# EAGLE board esp_teensy_bridge (EAGLE 9.6.2)
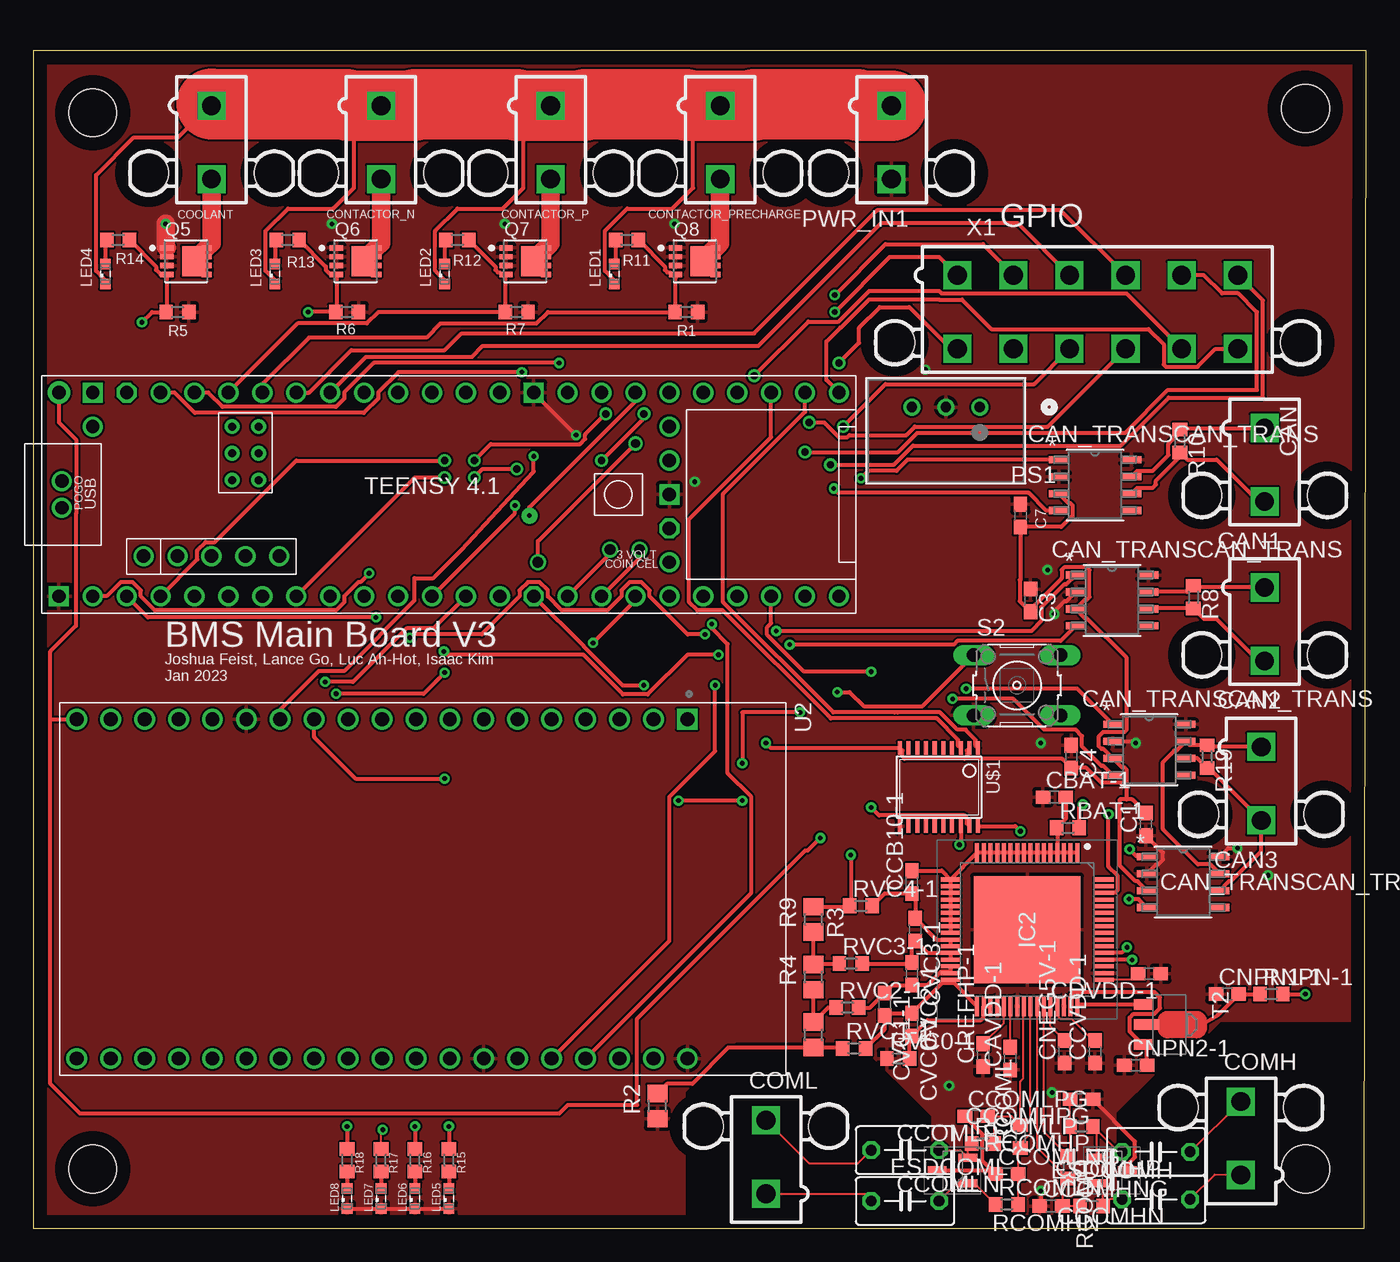
[diagram p0: board, top side]
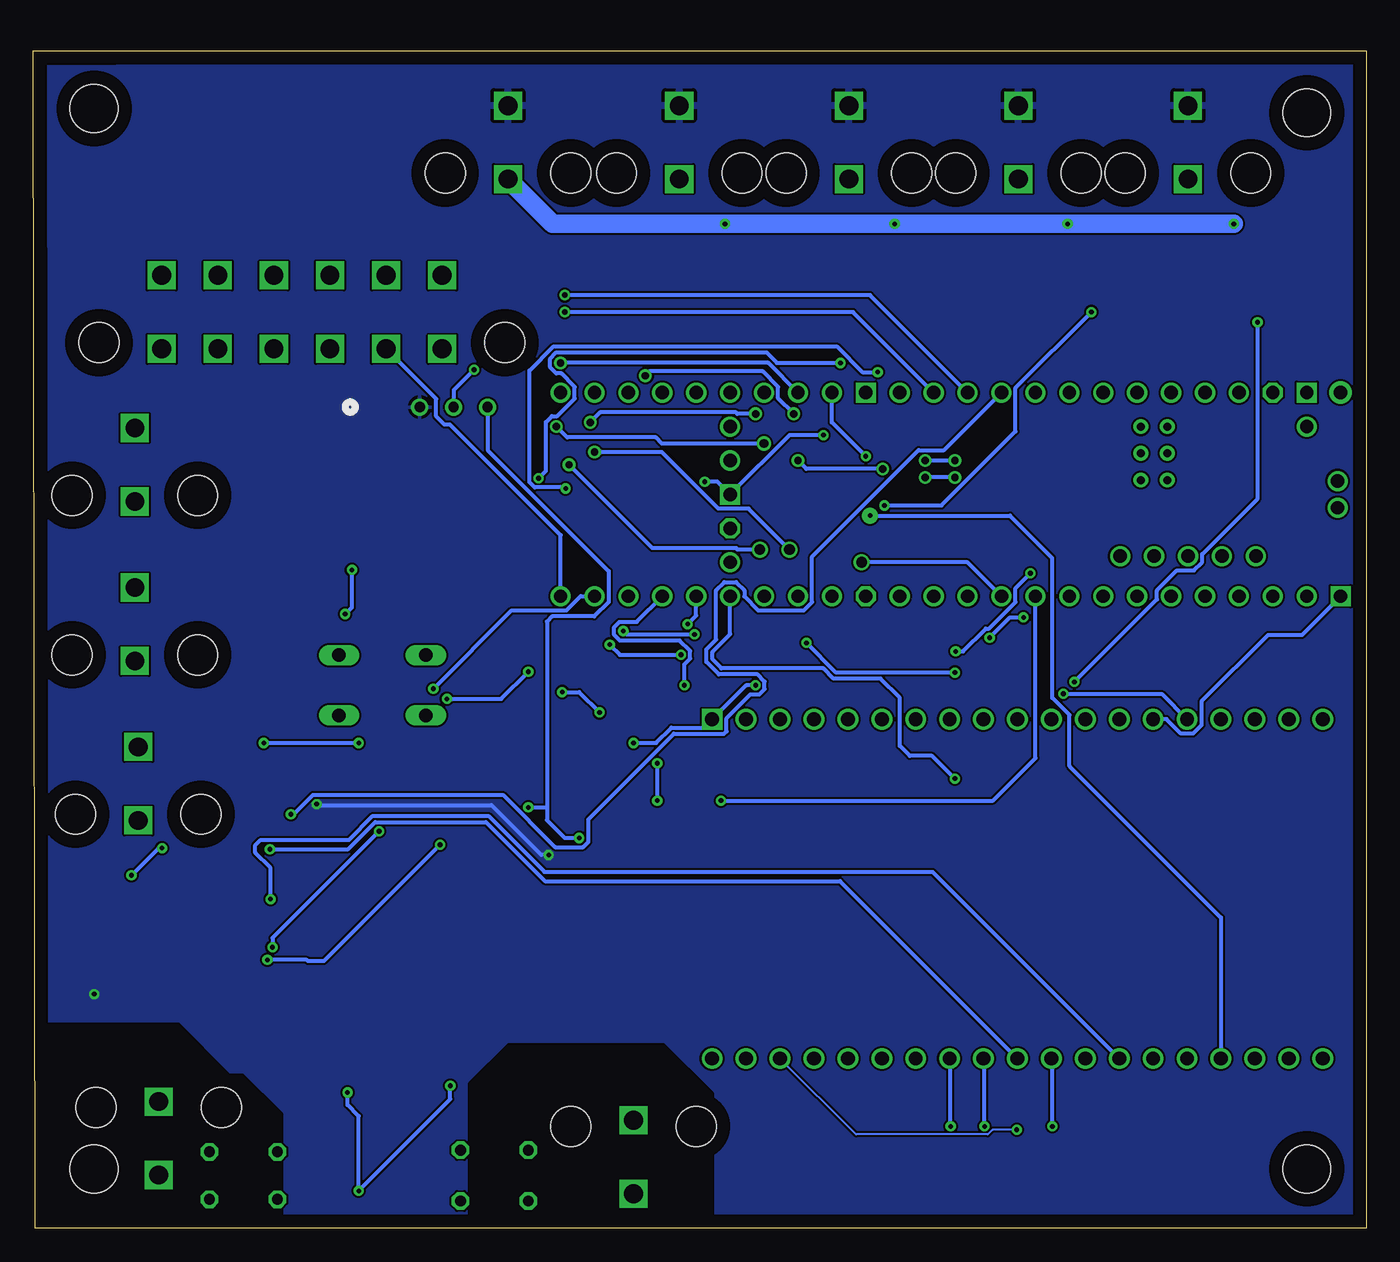
[diagram p1: board, bottom side, seen from below]

Size 99.8 x 88.13 mm. Coordinates in mm from the lower left corner, seen from the top.
Outline: 0,0 99.67,0 99.8,88.13 0,88.13 0,0
Copper layers (1*16): Top 0.035mm / dielectric 1.5mm / Bottom 0.035mm
Design rules "default *": minimum track width 6mil, minimum drill 0.35mm, track to track 6mil, track to pad 6mil, pad to pad 6mil, via to via 6mil, smd to smd 6mil, copper to edge 40mil, drill to drill 6mil, minimum pad ring 10mil, minimum via ring 8mil, stop-mask expansion 4mil, vias tented up to drill 0mil, thermal gap 10mil
Holes 3.6 mm at 4.45,4.45 95.25,4.45 95.25,83.82 4.45,83.5

## Footprints (pad centres in the part's own frame; a part is rotated, then mirrored left to right if it is on the bottom)
C0603 = smd 1.1 x 1: 1 -0.85,0; 2 0.85,0
5566-2 = drill 1.4 square: 1 0,-2.75; 2 0,2.75 | hole 3: 4.7,2.29; -4.7,2.29
C050-035X075 = drill 0.813 octagon: 1 -2.54,0; 2 2.54,0
SOT95P255X150-3N = smd 1.4 x 0.6: 1 -1.15,0.95; 2 -1.15,-0.95; 3 1.15,0
QFP50P1200X1200X120-65N = smd 1.475 x 0.3: 1 -5.738,3.75; 2 -5.738,3.25; 3 -5.738,2.75; 4 -5.738,2.25; 5 -5.738,1.75; 6 -5.738,1.25; 7 -5.738,0.75; 8 -5.738,0.25; 9 -5.738,-0.25; 10 -5.738,-0.75; 11 -5.738,-1.25; 12 -5.738,-1.75; 13 -5.738,-2.25; 14 -5.738,-2.75; 15 -5.738,-3.25; 16 -5.738,-3.75; 33 5.738,-3.75; 34 5.738,-3.25; 35 5.738,-2.75; 36 5.738,-2.25; 37 5.738,-1.75; 38 5.738,-1.25; 39 5.738,-0.75; 40 5.738,-0.25; 41 5.738,0.25; 42 5.738,0.75; 43 5.738,1.25; 44 5.738,1.75; 45 5.738,2.25; 46 5.738,2.75; 47 5.738,3.25; 48 5.738,3.75 | smd 0.3 x 1.475: 17 -3.75,-5.738; 18 -3.25,-5.738; 19 -2.75,-5.738; 20 -2.25,-5.738; 21 -1.75,-5.738; 22 -1.25,-5.738; 23 -0.75,-5.738; 24 -0.25,-5.738; 25 0.25,-5.738; 26 0.75,-5.738; 27 1.25,-5.738; 28 1.75,-5.738; 29 2.25,-5.738; 30 2.75,-5.738; 31 3.25,-5.738; 32 3.75,-5.738; 49 3.75,5.738; 50 3.25,5.738; 51 2.75,5.738; 52 2.25,5.738; 53 1.75,5.738; 54 1.25,5.738; 55 0.75,5.738; 56 0.25,5.738; 57 -0.25,5.738; 58 -0.75,5.738; 59 -1.25,5.738; 60 -1.75,5.738; 61 -2.25,5.738; 62 -2.75,5.738; 63 -3.25,5.738; 64 -3.75,5.738 | smd 8 x 8: 65 0,0
SML0603 = smd 0.8 x 0.8: A 0.75,0; C -0.75,0
TSR1-SINGLE_TRP = drill 0.762 pad 1.27: 1 0,0; 2 2.54,0; 3 5.08,0
VISHAY_SIS862DN-T1-GE3_0 = smd 0.99 x 0.405: 1 -1.435,0.99; 2 -1.435,0.33; 3 -1.435,-0.33; 4 -1.435,-0.99 | smd 0.76 x 0.405: 5,6,7,8 1.55,-0.99; 5,6,7,8-2 1.55,-0.33; 5,6,7,8-3 1.55,0.33; 5,6,7,8-4 1.55,0.99 | smd 1.725 x 2.235: 5,6,7,8-5 0.557,0
R0603 = smd 1 x 1.1: 1 -0.85,0; 2 0.85,0
R0805 = smd 1.3 x 1.5: 1 -0.95,0; 2 0.95,0
B3F-10XX = drill 1.016 long: 1 -3.251,2.261; 2 3.251,2.261; 3 -3.251,-2.261; 4 3.251,-2.261
SOT89-BCE = smd 0.8 x 1.4: B -1.499,-1.981; E 1.499,-1.981 | smd 0.8 x 1.9: C 0,-1.727
MAX3051ESA+ = smd 1.46 x 0.533: 1 -2.724,1.905; 2 -2.724,0.635; 3 -2.724,-0.635; 4 -2.724,-1.905; 5 2.724,-1.905; 6 2.724,-0.635; 7 2.724,0.635; 8 2.724,1.905
MODULE_ESP32-DEVKITC-32D = drill 1.04 square: 1 -12.7,19.76 | drill 1.04: 2 -12.7,17.22; 3 -12.7,14.68; 4 -12.7,12.14; 5 -12.7,9.6; 6 -12.7,7.06; 7 -12.7,4.52; 8 -12.7,1.98; 9 -12.7,-0.56; 10 -12.7,-3.1; 11 -12.7,-5.64; 12 -12.7,-8.18; 13 -12.7,-10.72; 14 -12.7,-13.26; 15 -12.7,-15.8; 16 -12.7,-18.34; 17 -12.7,-20.88; 18 -12.7,-23.42; 19 -12.7,-25.96; 20 12.7,19.76; 21 12.7,17.22; 22 12.7,14.68; 23 12.7,12.14; 24 12.7,9.6; 25 12.7,7.06; 26 12.7,4.52; 27 12.7,1.98; 28 12.7,-0.56; 29 12.7,-3.1; 30 12.7,-5.64; 31 12.7,-8.18; 32 12.7,-10.72; 33 12.7,-13.26; 34 12.7,-15.8; 35 12.7,-18.34; 36 12.7,-20.88; 37 12.7,-23.42; 38 12.7,-25.96
TSSOP20 = smd 0.305 x 0.991: 1 -2.925,-2.918; 2 -2.275,-2.918; 3 -1.625,-2.918; 4 -0.975,-2.918; 5 -0.325,-2.918; 6 0.325,-2.918; 7 0.975,-2.918; 8 1.625,-2.918; 9 2.275,-2.918; 10 2.925,-2.918; 11 2.925,2.918; 12 2.275,2.918; 13 1.625,2.918; 14 0.975,2.918; 15 0.325,2.918; 16 -0.325,2.918; 17 -0.975,2.918; 18 -1.625,2.918; 19 -2.275,2.918; 20 -2.925,2.918
TEENSY41 = drill 1: 0-RX1/CS1/CRX2 -27.94,-7.62; 1-TX1/MISO1/CTX2 -25.4,-7.62; 2-OUT2 -22.86,-7.62; 3-LRCLK2 -20.32,-7.62; 4-BCLK2 -17.78,-7.62; 5-IN2 -15.24,-7.62; 6-OUT1D -12.7,-7.62; 7-RX2/OUT1A -10.16,-7.62; 8-TX2/IN1 -7.62,-7.62; 9-OUT1C -5.08,-7.62; 10-CS\MQSR -2.54,-7.62; 11-MOSI/CTX1 0,-7.62; 12-MISO/MQSL 2.54,-7.62; 13-SCK/LED 2.54,7.62; 14-A0/TX3/SPDIF_OUT 0,7.62; 15-A1/RX3/SPDIF_IN -2.54,7.62; 16-A2/RX4/SCL1 -5.08,7.62; 17-A3/TX4/SDA1 -7.62,7.62; 18-A4/SDA0 -10.16,7.62; 19-A5/SCL0 -12.7,7.62; 20-A6/TX5/LRCLK1 -15.24,7.62; 21-A7/RX5/BCLK1 -17.78,7.62; 22-A8/CTX1 -20.32,7.62; 23-A9/CRX1/MCLK1 -22.86,7.62; 24-A10/TX6/SCL2 7.62,-7.62; 25-A11/RX6/SDA2 10.16,-7.62; 26-A12/MOSI1 12.7,-7.62; 27-A13/SCK1 15.24,-7.62; 28-RX7 17.78,-7.62; 29-TX7 20.32,-7.62; 30-CRX3 22.86,-7.62; 31-CTX3 25.4,-7.62; 32-OUT1B 27.94,-7.62; 33-MCLK2 27.94,7.62; 34-RX8 25.4,7.62; 35-TX8 22.86,7.62; 36-PWM 20.32,7.62; 37-PWM 17.78,7.62; 38-A14/CS/IN1 15.24,7.62; 39-A15/CS/OUT1A 12.7,7.62; 40-A16/CS1 10.16,7.62; 41-A17/MISO1 7.62,7.62; +5V -24.13,-4.62; D+ -30.25,-1; D- -30.25,1; DM -21.59,-4.62; DP -19.05,-4.62; GND4 -16.51,-4.62; GND5 -13.97,-4.62; ON/OFF 15.24,5.08; PROGRAM 15.24,2.54; VBAT 15.24,-5.08; VUSB -27.94,5.08 | drill 1 octagon: 3V3-1 5.08,-7.62; 3V3-2 15.24,-2.54; 3V3-3 -25.4,7.62 | drill 0.6: G -15.51,3.08; LED -17.51,3.08; R+ -17.51,5.08; R- -15.51,5.08; T+ -15.51,1.08; T- -17.51,1.08 | drill 1 square: GND1 -30.48,-7.62; GND2 15.24,0; GND3 5.08,7.62; GND6 -27.94,7.62 | drill 1 pad 1.676: VIN -30.48,7.62
5566-12 = drill 1.4 square: 1 10.5,-2.75; 2 6.3,-2.75; 3 2.1,-2.75; 4 -2.1,-2.75; 5 -6.3,-2.75; 6 -10.5,-2.75; 7 10.5,2.75; 8 6.3,2.75; 9 2.1,2.75; 10 -2.1,2.75; 11 -6.3,2.75; 12 -10.5,2.75 | hole 3: 15.2,2.29; -15.2,2.29

## Placement (x,y rotation side)
C1  0.1μF  [C0603]  83.31,30.23 90 top
C3  0.1μF  [C0603]  74.68,46.99 270 top
C4  0.1μF  [C0603]  77.72,35.31 270 top
C7  0.1μF  [C0603]  73.91,53.34 270 top
CAN1  5566-2  [5566-2]  92.2,57.15 180 top
CAN2  5566-2  [5566-2]  92.2,45.21 180 top
CAN3  5566-2  [5566-2]  91.95,33.27 180 top
CAVDD-1  1uf  [C0603]  73.15,12.7 90 top
CBAT-1  10 nf  [C0603]  76.45,32.26 0 top
CCB10-1  0.47uf  [C0603]  65.79,25.91 90 top
CCOMHN  2.2nf  [C050-035X075]  84.07,2.16 180 top
CCOMHNG  220pf  [C0603]  76.2,1.65 0 top
CCOMHP  2.2nf  [C050-035X075]  84.07,5.71 180 top
CCOMHPG  220pf  [C0603]  78.49,9.65 180 top
CCOMLN  2.2nf  [C050-035X075]  65.28,2.03 0 top
CCOMLNG  220pf  [C0603]  72.9,4.06 0 top
CCOMLP  2.2nf  [C050-035X075]  65.28,5.84 0 top
CCOMLPG  220pf  [C0603]  70.61,8.38 0 top
CCVDD-1  4.7uf  [C0603]  79.5,13.21 90 top
CDVDD-1  1uf  [C0603]  83.57,19.05 180 top
CNEG5V-1  0.1uf  [C0603]  77.22,13.21 90 top
CNPN1-1  0.22uf  [C0603]  89.41,17.53 0 top
CNPN2-1  0.1uf  [C0603]  82.55,12.19 0 top
COMH  5566-2  [5566-2]  90.42,6.73 0 top
COML  5566-2  [5566-2]  54.86,5.33 0 top
CONTACTOR_N  5566-2  [5566-2]  26.04,81.28 180 top
CONTACTOR_P  5566-2  [5566-2]  38.73,81.28 180 top
CONTACTOR_PRECHARGE  5566-2  [5566-2]  51.44,81.28 180 top
COOLANT  5566-2  [5566-2]  13.34,81.28 180 top
CREFHP-1  1uf  [C0603]  71.12,12.95 90 top
CVC0-1  0.47uf  [C0603]  65.79,15.24 270 top
CVC1-1  0.47uf  [C0603]  63.75,16.76 270 top
CVC2-1  0.47uf  [C0603]  65.79,19.05 270 top
CVC3-1  0.47uf  [C0603]  66.04,22.35 270 top
ESDCOMH  ESDAVLC6-2BLY  [SOT95P255X150-3N]  80.77,4.32 0 top
ESDCOML  ESDAVLC6-2BLY  [SOT95P255X150-3N]  68.83,4.32 180 top
IC2  PBQ79656PAPTQ1  [QFP50P1200X1200X120-65N]  74.42,22.35 270 top
LED1  [SML0603]  43.5,71.44 90 top
LED2  [SML0603]  30.8,71.44 90 top
LED3  [SML0603]  18.1,71.44 90 top
LED4  [SML0603]  5.4,71.44 90 top
LED5  [SML0603]  31.11,2.22 90 top
LED6  [SML0603]  28.57,2.22 90 top
LED7  [SML0603]  26.04,2.22 90 top
LED8  [SML0603]  23.5,2.22 90 top
PS1  TSR_1-2450  [TSR1-SINGLE_TRP]  70.87,61.47 180 top
PWR_IN1  5566-2  [5566-2]  64.26,81.28 180 top
Q5  VISHAY_SIS862DN-T1-GE3VISHAY_SIS862DN-T1-GE3_0_0  [VISHAY_SIS862DN-T1-GE3_0]  11.43,72.39 0 top
Q6  VISHAY_SIS862DN-T1-GE3VISHAY_SIS862DN-T1-GE3_0_0  [VISHAY_SIS862DN-T1-GE3_0]  24.13,72.39 0 top
Q7  VISHAY_SIS862DN-T1-GE3VISHAY_SIS862DN-T1-GE3_0_0  [VISHAY_SIS862DN-T1-GE3_0]  36.83,72.39 0 top
Q8  VISHAY_SIS862DN-T1-GE3VISHAY_SIS862DN-T1-GE3_0_0  [VISHAY_SIS862DN-T1-GE3_0]  49.53,72.39 0 top
R1  10k  [R0603]  48.9,68.58 180 top
R2  [R0805]  46.74,9.14 90 top
R3  [R0805]  58.42,14.48 90 top
R4  [R0805]  58.42,18.8 90 top
R5  10k  [R0603]  10.79,68.58 180 top
R6  10k  [R0603]  23.5,68.58 180 top
R7  10k  [R0603]  36.2,68.58 180 top
R8  120  [R0603]  86.87,47.24 270 top
R9  [R0805]  58.42,23.11 90 top
R10  120  [R0603]  85.85,58.93 270 top
R11  10k  [R0603]  44.45,73.98 180 top
R12  10k  [R0603]  31.75,73.98 180 top
R13  10k  [R0603]  19.05,73.98 180 top
R14  10k  [R0603]  6.35,73.98 180 top
R15  50  [R0603]  31.11,5.08 270 top
R16  50  [R0603]  28.57,5.08 270 top
R17  50  [R0603]  26.04,5.08 270 top
R18  50  [R0603]  23.5,5.08 270 top
R19  120  [R0603]  87.88,35.31 270 top
RBAT-1  30  [R0603]  77.47,29.97 0 top
RCOMH  1k  [R0603]  77.47,4.57 270 top
RCOMHN  49  [R0603]  79.25,1.65 180 top
RCOMHP  49  [R0603]  78.49,7.62 180 top
RCOML  1k  [R0603]  73.91,6.86 90 top
RCOMLN  49  [R0603]  72.9,1.78 0 top
RCOMLP  49  [R0603]  71.12,6.35 0 top
RNPN-1  49  [R0603]  92.71,17.53 0 top
RVC0-1  100  [R0603]  64.77,12.7 0 top
RVC1-1  100  [R0603]  61.47,13.46 0 top
RVC2-1  100  [R0603]  60.96,16.51 0 top
RVC3-1  100  [R0603]  61.21,19.81 0 top
RVC4-1  100  [R0603]  61.98,24.13 0 top
S2  [B3F-10XX]  73.66,40.64 0 top
T2  PBHV8115X, 115  [SOT89-BCE]  85.09,15.24 270 top
U1  CAN_TRANSCAN_TRANS  [MAX3051ESA+]  80.77,46.99 0 top
U2  ESP32-DEVKITC-32D  [MODULE_ESP32-DEVKITC-32D]  29.21,25.4 270 top
U3  CAN_TRANSCAN_TRANS  [MAX3051ESA+]  83.57,35.81 0 top
U4  CAN_TRANSCAN_TRANS  [MAX3051ESA+]  86.11,25.91 0 top
U5  CAN_TRANSCAN_TRANS  [MAX3051ESA+]  79.5,55.63 0 top
U$1  TXB0108PWSMD  [TSSOP20]  67.82,33.02 180 top
U$3  TEENSY41  [TEENSY41]  32.38,54.93 0 top
X1  5566-12  [5566-12]  79.69,68.58 180 top

## Library data of the parts
C1 C3 C4 C7 CAVDD-1 CBAT-1 CCB10-1 CCOMHN CCOMHNG CCOMHP CCOMHPG CCOMLN CCOMLNG CCOMLP CCOMLPG CCVDD-1 CDVDD-1 CNEG5V-1 CNPN1-1 CNPN2-1 CREFHP-1 CVC0-1 CVC1-1 CVC2-1 CVC3-1 = rcl; SPICEPREFIX: C
CAN1-CAN3 COMH COML CONTACTOR_N CONTACTOR_P CONTACTOR_PRECHARGE COOLANT PWR_IN1 = con-molex; MF: MOLEX; OC_FARNELL: 1822072; OC_NEWARK: unknown
ESDCOMH ESDCOML = ESDAVLC6-2BLY; DESCRIPTION: STMICROELECTRONICS - ESDAVLC6-2BLY - ESD Protection Device, 17 V, SOT-23, 3 Pins, 5 V, 140 W, ESDA Transil Series; HEIGHT: 1.5mm; MANUFACTURER_NAME: STMicroelectronics; MANUFACTURER_PART_NUMBER: ESDAVLC6-2BLY; MOUSER_PART_NUMBER: 511-ESDAVLC6-2BLY; MOUSER_PRICE-STOCK: https://www.mouser.co.uk/ProductDetail/STMicroelectronics/ESDAVLC6-2BLY?qs=l7cgNqFNU1iH2e21evvYsA%3D%3D
IC2 = PBQ79656PAPTQ1; DESCRIPTION: BQ7965x-Q1 Family of 12S, 14S, 16S Precision Automotive Battery Monitor, Balancer and Integrated Hardware Protector with up to SafeTITM-26262 ASIL-D Compliance; HEIGHT: 1.2mm; MANUFACTURER_NAME: Texas Instruments; MANUFACTURER_PART_NUMBER: PBQ79656PAPTQ1
LED1-LED8 = led
PS1 = dcdc_5v; COPYRIGHT: Copyright (C) 2023 Ultra Librarian. All rights reserved.; DIGI-KEY_PART_NUMBER_1: 1951-2747-ND; MANUFACTURER_PART_NUMBER: TSR 1-2450; MFR_NAME: Traco Power
Q5-Q8 = Vishay - SIS862DN-T1-GE3; CENTROID_NOT_SPECIFIED: No; CONTINUOUS_DRAIN_CURRENT: 40A; DATASHEET: http://www.vishay.com/docs/63346/sis862dn.pdf; DEVICE_CLASS_L1: Discrete Semiconductors; DEVICE_CLASS_L2: Transistors; DEVICE_CLASS_L3: MOSFETs; DIGIKEY_DESCRIPTION: TRANS MOSFET N-CH 60V 40A 1212; DIGIKEY_PART_NUMBER: SIS862DN-T1-GE3CT-ND; DRAIN_TO_SOURCE_BREAKDOWN_VOLTAGE: 60V; DRAIN_TO_SOURCE_RESISTANCE: 0.007Ω; DRAIN_TO_SOURCE_VOLTAGE: 60V; GATE_TO_SOURCE_VOLTAGE: 20V; HEIGHT: 1.12mm; INPUT_CAPACITACE_AT_VDS: 1320pF @ 30V; LEAD_FREE: yes; MAX_JUNCTION_TEMP: +150°C; MF: Vishay; MFG_PACKAGE_IDENT: S16-2667; MFG_PACKAGE_IDENT_DATE: 01/2017; MFG_PACKAGE_IDENT_REV: M; MOUSER_DESCRIPTION: N-Channel 60 V 8.5 mOhm 52 W TrenchFET Power Mosfet - PowerPAK 1212-8; MOUSER_PART_NUMBER: 78-SIS862DN-T1-GE3; MPN: SIS862DN-T1-GE3; NUMBER_OF_CHANNELS: 1; NUMBER_OF_N_CHANNELS: 1; PACKAGE: PowerPAK1212-8; POWER_DISSIPATION: 52W; PREFIX: Q; ROHS: yes; STANDOFF_HEIGHT: 0mm; TECHNOLOGY: MOSFET; TEMPERATURE_RANGE_HIGH: +150°C; TEMPERATURE_RANGE_LOW: -55°C; THRESHOLD_VGS: 2.6V; TURN_OFF_DELAY_TIME: 15ns; TURN_ON_DELAY_TIME: 23ns; VERIFICATION_VERSION: 0.0.0.1
R1-R19 RBAT-1 RCOMH RCOMHN RCOMHP RCOML RCOMLN RCOMLP RNPN-1 RVC0-1 RVC1-1 RVC2-1 RVC3-1 RVC4-1 = rcl; SPICEPREFIX: R
S2 = switch-omron; MPN: B3F-1000; OC_FARNELL: 176432; OC_NEWARK: 36M3542
T2 = transistor
U1 U3-U5 = NFR23_v1.1; COPYRIGHT: Copyright (C) 2022 Ultra Librarian. All rights reserved.; DIGI-KEY_PART_NUMBER_1: MAX3051ESA+-ND; MANUFACTURER_PART_NUMBER: MAX3051ESA+; MFR_NAME: Maxim Integrated Products
U2 = ESP32-DEVKITC-32D; AVAILABILITY: In Stock; DESCRIPTION: WiFi Development Tools (802.11) ESP32 General Development Kit, ESP32-WROOM-32D on the board; MF: Espressif Systems; MP: ESP32-DEVKITC-32D; PACKAGE: None; PRICE: None; PURCHASE-URL: https://pricing.snapeda.com/search/part/ESP32-DEVKITC-32D/?ref=eda
U$1 = TB0108
U$3 = teensy
X1 = con-molex; MF: MOLEX; OC_FARNELL: unknown; OC_NEWARK: unknown

## Nets
3V3: C1.2 C3.2 C4.2 C7.2 U1.3 U2.1 U3.3 U4.3 U5.3 U$1.2 U$1.10 U$3.3V3-1
5V: PS1.3 U2.19 U$1.19 U$3.VIN
CANH1: CAN1.1 R10.1 U5.7
CANH2: CAN2.1 R8.1 U1.7
CANH3: CAN3.1 R19.1 U3.7 U4.7
CANL1: CAN1.2 R10.2 U5.6
CANL2: CAN2.2 R8.2 U1.6
CANL3: CAN3.2 R19.2 U3.6 U4.6
COMHN: CCOMHN.1 COMH.1
COMHP: CCOMHP.1 COMH.2
COMLN: CCOMLN.1 COML.1
COMLP: CCOMLP.1 COML.2
CONTACTORN_CTRL: Q6.4 R6.2 R13.1 U$3.10-CS\MQSR
CONTACTORP_CTRL: Q7.4 R7.2 R12.1 U$3.21-A7/RX5/BCLK1
CONTACTORPRECHARGE_CTRL: Q8.4 R1.2 R11.1 U$3.20-A6/TX5/LRCLK1
COOLANT_CTRL: Q5.4 R5.2 R14.1 U$3.11-MOSI/CTX1
CRX1: U5.4 U$3.23-A9/CRX1/MCLK1
CRX2: U1.4 U$3.0-RX1/CS1/CRX2
CRX3: U3.4 U$3.30-CRX3
CS1: U2.35 U$3.39-A15/CS/OUT1A
CTX1: U5.1 U$3.22-A8/CTX1
CTX2: U1.1 U$3.1-TX1/MISO1/CTX2
CTX3: U3.1 U$3.31-CTX3
CVDD-1: CCVDD-1.2 IC2.45
ESPCANRX: U2.32 U4.4
ESPCANTX: U2.29 U4.1
GND: C1.1 C3.1 C4.1 C7.1 CAVDD-1.1 CBAT-1.1 CCOMHNG.1 CCOMHPG.1 CCVDD-1.1 CDVDD-1.1 CNEG5V-1.1 CNPN1-1.1 CNPN2-1.1 CREFHP-1.1 ESDCOMH.3 IC2.36 IC2.39 IC2.46 IC2.50 IC2.65 LED5.C LED6.C LED7.C LED8.C PS1.2 PWR_IN1.2 Q5.1 Q5.2 Q5.3 Q6.1 Q6.2 Q6.3 Q7.1 Q7.2 Q7.3 Q8.1 Q8.2 Q8.3 R1.1 R2.1 R5.1 R6.1 R7.1 RVC0-1.1 S2.3 U1.2 U1.8 U2.14 U2.20 U2.26 U3.2 U3.8 U4.2 U4.8 U5.2 U5.8 U$1.11 U$3.GND1 U$3.GND2 U$3.GND3
GNDL: CCOMLNG.1 CCOMLPG.1 ESDCOML.3
LDOIN-1: CNPN2-1.2 IC2.47 T2.E
MISO_ESP: U2.13 U$3.41-A17/MISO1
MOSI_ESP: U2.15 U$3.26-A12/MOSI1
N$1: CCOMHP.2 ESDCOMH.1 RCOMHP.1
N$2: CONTACTOR_N.2 Q6.5,6,7,8 Q6.5,6,7,8-2 Q6.5,6,7,8-3 Q6.5,6,7,8-4 Q6.5,6,7,8-5
N$3: LED1.A R11.2
N$4: LED2.A R12.2
N$5: COOLANT.2 Q5.5,6,7,8 Q5.5,6,7,8-2 Q5.5,6,7,8-3 Q5.5,6,7,8-4 Q5.5,6,7,8-5
N$6: CONTACTOR_PRECHARGE.2 Q8.5,6,7,8 Q8.5,6,7,8-2 Q8.5,6,7,8-3 Q8.5,6,7,8-4 Q8.5,6,7,8-5
N$7: S2.1 U$3.8-TX2/IN1
N$8: CCOMHN.2 ESDCOMH.2 RCOMHN.1
N$9: LED3.A R13.2
N$10: CCOMLNG.2 IC2.41 RCOML.1 RCOMLN.2
N$11: R17.1 U2.22
N$12: CONTACTOR_P.2 Q7.5,6,7,8 Q7.5,6,7,8-2 Q7.5,6,7,8-3 Q7.5,6,7,8-4 Q7.5,6,7,8-5
N$13: LED4.A R14.2
N$14: U$3.14-A0/TX3/SPDIF_OUT X1.1
N$17: U$3.15-A1/RX3/SPDIF_IN X1.2
N$18: U$3.18-A4/SDA0 X1.3
N$19: U$3.19-A5/SCL0 X1.4
N$20: U$3.24-A10/TX6/SCL2 X1.5
N$21: U$3.25-A11/RX6/SDA2 X1.6
N$22: U$3.40-A16/CS1 X1.7
N$23: U$3.32-OUT1B X1.8
N$24: U$3.9-OUT1C X1.9
N$25: U$3.6-OUT1D X1.10
N$26: U$3.33-MCLK2 X1.12
N$27: U$3.2-OUT2 X1.11
N$28: R15.1 U2.27
N$29: R16.1 U2.28
N$31: R18.1 U2.30
N$32: LED5.A R15.2
N$33: LED6.A R16.2
N$34: LED7.A R17.2
N$35: LED8.A R18.2
N$41: IC2.51
N$49: CCOMLPG.2 IC2.40 RCOML.2 RCOMLP.2
N$67: CCOMLP.2 ESDCOML.2 RCOMLP.1
N$68: CCOMLN.2 ESDCOML.1 RCOMLN.1
N$72: R3.2 R4.1 RVC2-1.1
N$73: R2.2 R3.1 RVC1-1.1
N$75: R4.2 R9.1 RVC3-1.1
N$111: CREFHP-1.2 IC2.37
N$112: CAVDD-1.2 IC2.38
N$113: CNEG5V-1.2 IC2.44
N$114: CDVDD-1.2 IC2.49
N$130: CNPN1-1.2 RNPN-1.1 T2.C
N$131: CCOMHPG.2 IC2.43 RCOMH.1 RCOMHP.2
N$132: CCOMHNG.2 IC2.42 RCOMH.2 RCOMHN.2
NFAULT: IC2.62 U$3.16-A2/RX4/SCL1
NPNB-1: IC2.48 T2.B
RX_BQ: IC2.52 U$1.18
RX_ESP: U2.24 U$3.29-TX7
RX_SHFT: U$1.1 U$3.34-RX8
SCK_ESP: U2.12 U$3.27-A13/SCK1
TEMP9: IC2.61
TEMP10: IC2.60
TEMP11: IC2.59
TEMP13: IC2.57
TEMP14: IC2.56
TEMP15: IC2.55
TEMP16: IC2.54
TX_BQ: IC2.53 U$1.20
TX_ESP: U2.23 U$3.28-RX7
TX_SHFT: U$1.3 U$3.35-TX8
VC0-1: CVC0-1.2 IC2.34 IC2.35 RVC0-1.2
VC1-1: CVC0-1.1 CVC1-1.2 IC2.32 IC2.33 RVC1-1.2
VC2-1: CVC1-1.1 CVC2-1.2 IC2.30 IC2.31 RVC2-1.2
VC3-1: CVC2-1.1 CVC3-1.2 IC2.28 IC2.29 RVC3-1.2
VC4-1: CCB10-1.1 CVC3-1.1 IC2.26 IC2.27 RVC4-1.2
VC_CB_HIGH-1: CBAT-1.2 CCB10-1.2 IC2.1 IC2.2 IC2.3 IC2.4 IC2.5 IC2.6 IC2.7 IC2.8 IC2.9 IC2.10 IC2.11 IC2.12 IC2.13 IC2.14 IC2.15 IC2.16 IC2.17 IC2.18 IC2.19 IC2.20 IC2.21 IC2.22 IC2.23 IC2.24 IC2.25 RBAT-1.1
VCC: CONTACTOR_N.1 CONTACTOR_P.1 CONTACTOR_PRECHARGE.1 COOLANT.1 LED1.C LED2.C LED3.C LED4.C PS1.1 PWR_IN1.1 R9.2 RBAT-1.2 RNPN-1.2 RVC4-1.1

## Tracks (layer width: path | path; a pad name or v marks a point on that pad's centre or on a via)
3V3  (via drill 0.35)
  Top 0.305: U$3.3V3-1 41.23,43.55 41.23,43.53 44.12,40.64 v45.72,40.64 | 69.72,35.14 69.9,35.32 69.9,35.74 U$1.2 | 69.72,35.14 65.26,35.14 65.09,35.32 65.09,35.74 U$1.10 55.25,35.94 v54.86,36.32 | U5.3 77.48,54.29 77.63,54.29 77.81,54.11 77.81,53.33 76.97,52.49 C7.2 73.91,48.56 73.87,48.52 73.87,46.95 C3.2 75.02,46.49 75.02,46.67 77.01,48.66 77.01,49.29 77.19,49.47 78.9,49.47 79.08,49.29 79.08,47.23 78.9,47.05 78.75,47.05 U1.3 78.75,45.66 78.9,45.66 81.88,42.68 81.88,37.33 81.7,37.15 80.11,37.15 79.81,36.84 79.81,36.06 79.98,35.88 80.14,35.88 U3.3 81.54,34.48 81.7,34.48 81.88,34.3 81.88,33.52 | 81.88,33.52 81.7,33.34 79.98,33.34 78.87,34.46 C4.2 77.04,35.14 69.72,35.14 | U4.3 82.68,25.97 82.53,25.97 81.37,27.13 81.37,32.09 81.88,32.09 | 81.88,32.09 81.88,33.52 | C1.2 82.3,32.09 81.88,32.09
  Bottom 0.305: v45.72,40.64 46.43,40.64 U2.1 49.6,37.47 52.02,37.47 53.17,36.32 v54.86,36.32
5V  (via drill 0.35)
  Top 0.305: 1.27,38.1 1.27,10.79 3.49,8.57 39.37,8.57 40.04,9.24 45.21,9.24 45.21,15.68 57.78,28.26 57.98,28.26 v58.93,29.21 | 1.27,38.1 1.27,43.18 3.17,45.09 3.17,53.47 3.19,53.49 3.19,59.04 1.91,60.33 U$3.VIN | 1.27,38.1 U2.19 | U$1.19 69.9,30.3 69.9,30.72 69.72,30.9 63.33,30.9 v62.74,31.5
  Bottom 0.305: 61.34,31.5 61.34,30.54 60.01,29.21 v58.93,29.21 | v62.74,31.5 61.34,31.5 | PS1.3 65.79,58.24 56.73,49.18 56.73,46.87 57.8,45.79 60.95,45.79 61.34,45.4 61.34,31.5
CANH1
  Top 0.305: CAN1.1 85.97,59.9 R10.1 85.85,59.56 85,58.7 85,57.88 83.79,56.67 82.64,56.67 U5.7
CANH2
  Top 0.305: CAN2.1 87,47.96 R8.1 86.4,47.62 U1.7
CANH3
  Top 0.305: CAN3.1 88.02,36.02 R19.1 86.58,36.16 U3.7 85.59,35.75 85.43,35.75 84.58,34.9 84.58,29.88 87.22,27.24 88.13,27.24 U4.7
CANL1
  Top 0.305: CAN1.2 91.74,54.4 88.61,57.53 86.4,57.53 R10.2 85.85,57.75 84.07,55.97 84.07,55.68 83.79,55.4 82.64,55.4 U5.6
CANL2
  Top 0.305: CAN2.2 91.74,42.46 88.61,45.59 87.67,45.59 R8.2 83.53,46.39 U1.6
CANL3
  Top 0.305: U3.6 87.16,35.18 R19.2 88.02,34.46 CAN3.2 91.95,28.23 89.69,25.97 89.53,25.97 U4.6
COMHN
  Top 0.152: CCOMHN.1 88.46,4 90.39,3.95 COMH.1
COMHP
  Top 0.152: COMH.2 86.61,5.67 CCOMHP.1
COMLN
  Top 0.152: COML.1 62.78,2.58 CCOMLN.1
COMLP
  Top 0.152: COML.2 58.12,4.83 61.72,4.83 CCOMLP.1
CONTACTORN_CTRL  (via drill 0.35)
  Top 0.305: R13.1 21.89,71.98 21.89,71.73 22.23,71.4 Q6.4 22.7,68.63 | 22.7,68.63 R6.2 | U$3.10-CS\MQSR 36.07,53.53 v36.07,54.1 | v20.57,68.58 20.62,68.63 22.7,68.63
  Bottom 0.305: v20.57,68.58 26.25,62.91 26.25,59.64 31.79,54.1 v36.07,54.1
CONTACTORP_CTRL
  Top 0.305: U$3.21-A7/RX5/BCLK1 19.78,67.72 24.97,67.72 25.83,68.58 R7.2 35.34,71.12 | 35.34,71.12 35.34,71.35 Q7.4 | R12.1 34.59,71.98 34.59,71.73 34.77,71.55 34.91,71.55 35.34,71.12
CONTACTORPRECHARGE_CTRL
  Top 0.305: U$3.20-A6/TX5/LRCLK1 17.14,63.18 20.64,66.67 29.43,66.67 30.48,67.72 37.67,67.72 38.53,68.58 R1.2 48.09,68.63 48.09,71.12 | 48.09,71.12 Q8.4 | R11.1 47.3,71.98 47.3,71.73 47.47,71.55 47.66,71.55 48.09,71.12
COOLANT_CTRL  (via drill 0.35)
  Top 0.305: R14.1 9.2,71.98 9.2,71.73 9.53,71.4 Q5.4 9.99,68.63 R5.2 8.89,68.58 v8.13,67.82 | U$3.11-MOSI/CTX1 29.98,44.91 27.94,44.91 23.93,40.89 v21.84,40.89
  Bottom 0.305: v8.13,67.82 8.13,54.61 12.28,50.46 12.28,49.87 12.9,49.25 14.16,49.25 15.66,47.75 15.66,47.07 v21.84,40.89
CRX1  (via drill 0.35)
  Top 0.305: U5.4 75.86,53.72 74.54,55.05 60.27,55.05 v59.94,55.37 | v36.58,64.09 27.35,64.09 25.82,62.56 25.82,62.11 24.75,61.03 12.08,61.03 10.57,62.55 U$3.23-A9/CRX1/MCLK1
  Bottom 0.305: v36.58,64.09 37.72,64.09 39.64,66.01 60.84,66.01 62.66,64.19 62.66,55.85 62.26,55.45 60.02,55.45 v59.94,55.37
CRX2  (via drill 0.35)
  Top 0.305: U1.4 76.93,43.97 69.2,43.97 68.93,43.69 v56.64,43.69 | v30.73,43.18 30.99,42.93 41.19,42.93 44.16,39.96 46,39.96 48.97,42.93 v51.31,42.93 | v25.15,49.02 24.49,48.37 24.33,48.37 23.28,47.32 23.28,46.87 22.66,46.25 9.09,46.25 8.04,47.29 8.04,47.75 7.42,48.37 6.55,48.37 5.49,47.31 U$3.0-RX1/CS1/CRX2
  Bottom 0.305: v56.64,43.69 55.88,42.93 v51.31,42.93 | v25.15,49.02 26.25,47.92 26.25,46.87 28.24,44.88 28.48,44.88 30.18,43.18 v30.73,43.18
CRX3  (via drill 0.35)
  Top 0.305: U3.4 80.14,34.61 79.98,34.61 78.53,36.06 78.53,36.83 78.05,37.31 75.71,37.31 73.4,39.62 v68.83,39.62 | v62.74,41.66 57.71,41.66 54.94,44.42 54.94,44.99 55.24,45.29 U$3.30-CRX3
  Bottom 0.305: v68.83,39.62 64.77,39.62 v62.74,41.66
CS1  (via drill 0.35 pad 1.2)
  Top 0.305: U$3.39-A15/CS/OUT1A 45.09,61.91 37.15,53.98 v37.15,53.34
  Bottom 0.305: v37.15,53.34 26.67,53.34 23.5,50.16 23.5,39.71 22.21,38.43 22.21,34.6 10.87,23.25 U2.35
CTX1  (via drill 0.35)
  Top 0.305: U5.1 65.47,57.53 64.63,56.69 62.53,56.69 v61.98,56.13 | v39.37,64.77 25.49,64.77 23.28,62.56 23.28,62.11 22.66,61.49 14.17,61.49 13.11,62.55 U$3.22-A8/CTX1
  Bottom 0.305: v39.37,64.77 44.12,64.77 44.9,65.55 60.65,65.55 61.11,65.09 61.11,64.45 60.65,63.99 60.27,63.99 59.27,62.99 59.27,62.11 60.59,60.79 60.97,60.79 61.42,60.33 61.42,56.68 v61.98,56.13
CTX2  (via drill 0.35)
  Top 0.305: U1.1 77.35,48.2 77.19,48.2 75.48,46.49 75.48,45.46 74.72,44.7 v55.63,44.7 | v28.19,44.2 28.45,44.45 33.56,44.45 36.41,47.29 36.41,47.75 37.03,48.37 37.9,48.37 38.52,47.75 38.52,47.29 39.57,46.25 42.98,46.25 44.03,47.29 44.03,47.75 44.65,48.37 45.52,48.37 46.14,47.75 46.14,47.29 48.98,44.45 v50.29,44.45 | v25.65,45.72 8.57,45.72 U$3.1-TX1/MISO1/CTX2
  Bottom 0.305: v55.63,44.7 55.37,44.45 v50.29,44.45 | v28.19,44.2 26.67,45.72 v25.65,45.72
CTX3  (via drill 0.35)
  Top 0.305: U3.1 78.17,40.39 v69.85,40.39
  Bottom 0.305: U$3.31-CTX3 58.83,47.31 59.89,46.25 63.99,46.25 v69.85,40.39
CVDD-1
  Top 0.152: IC2.45 76.79,16.49 76.79,15.78 76.93,15.65 77.76,15.65 79.35,14.06 CCVDD-1.2
ESPCANRX  (via drill 0.35)
  Top 0.305: U4.4 82.75,24.64 v82.04,24.64
  Bottom 0.305: v82.04,24.64 82.04,26.97 83.18,28.11 83.18,28.68 82.78,29.08 76.17,29.08 74.39,30.86 65.72,30.86 61.53,26.67 32.46,26.67 U2.32
ESPCANTX  (via drill 0.35)
  Top 0.305: U4.1 82.64,27.81 v82.09,28.37
  Bottom 0.305: v82.09,28.37 76.23,28.37 74.2,30.4 65.91,30.4 61.5,25.99 39.4,25.99 U2.29
GND  (via drill 0.35)
  Top 0.305: U$3.GND3 v40.64,59.37 | LED8.C LED7.C LED6.C LED5.C | v75.44,2.79 75.44,1.74 CCOMHNG.1 | U1.2 77.35,46.93 77.19,46.93 76.45,46.19 v76.45,45.97 | U3.2 82.42,36.45 v82.55,36.32 | ESDCOMH.3 81.92,4.74 82.5,5.32 82.5,6.49 CCOMHPG.1 | U4.2 84.08,27.24 84.24,27.24 84.58,27.59 84.58,28.11 C1.1 | U4.8 89.47,28.45 v90.17,28.45
  Top 1.372: Q5.1 9.91,73.47 v9.91,75.18
  Bottom 0.305: v40.64,59.37 43.18,59.37 U$3.GND2 48.58,55.88 v49.53,55.88 | U$3.GND1 4.81,44.4 7.36,44.4 12.32,39.44 12.32,37.65 12.96,37.02 13.86,37.02 14.94,38.1 U2.14 | v68.58,10.67 68.58,9.65 v75.44,2.79 75.44,8.38 76.28,9.22 v76.28,10.16 | v66.8,64.26 68.33,62.74 PS1.2 | v76.45,45.97 75.95,46.48 v75.95,49.28 | v82.55,36.32 v75.44,36.32 | v90.17,28.45 90.42,28.45 v92.46,26.42
  Bottom 1.372: v9.91,75.18 v22.35,75.18 v35.31,75.18 v48.01,75.18 60.92,75.18 PWR_IN1.2
  pour Top: 99.31,15.49 88.9,15.49 85.09,11.68 84.07,11.68 81.03,8.64 81.03,0.51 67.07,0.51 67.31,6.22 67.31,8.38 61.72,13.97 52.58,13.97 48.77,10.16 48.77,0.51 0.51,0.51 0.25,0.25 0.25,87.63 98.81,87.63 99.31,87.12
GNDL
  Top 0.305: ESDCOML.3 71.79,4.32 CCOMLNG.1 71.08,5.04 71.08,7.03 69.76,8.34 CCOMLPG.1
LDOIN-1
  Top 0.305: CNPN2-1.2 83.4,13.45 T2.E 83.08,13.74 82.11,14.71 82.11,15.77 82.38,16.03 83.94,16.03 84.37,16.47 84.37,17.27 83.98,17.66 77.9,17.66 77.72,17.48 77.72,16.66 IC2.47
MISO_ESP  (via drill 0.35)
  Top 0.305: v37.47,57.78 37.47,56.63 32.07,50.8 29.93,48.67 28.55,48.67 28.55,46.99 23.26,41.7 21.37,41.7 18.49,38.82 U2.13
  Bottom 0.305: v37.47,57.78 40.01,60.33 U$3.41-A17/MISO1
MOSI_ESP  (via drill 0.35)
  Top 0.305: v22.67,40.01 29.21,40.01 v30.8,41.59 | v41.91,43.81 45.09,46.99 U$3.26-A12/MOSI1
  Bottom 0.305: v30.8,41.59 39.69,41.59 v41.91,43.81 | U2.15 15.31,40.01 v22.67,40.01
N$1
  Top 0.152: CCOMHP.2 81.24,5.71 79.62,7.33 | ESDCOMH.1 79.62,7.33 | 79.62,7.33 RCOMHP.1
N$2
  Top 0.305: Q6.5,6,7,8-2 Q6.5,6,7,8-3 Q6.5,6,7,8-4 | Q6.5,6,7,8-2 25.35,72.39 Q6.5,6,7,8-5 Q6.5,6,7,8-4 | Q6.5,6,7,8 Q6.5,6,7,8-2
  Top 1.372: CONTACTOR_N.2 26.04,73.74 Q6.5,6,7,8-4 Q6.5,6,7,8-5
N$3
  Top 0.305: R11.2 43.6,72.29 LED1.A
N$4
  Top 0.305: R12.2 30.8,73.88 LED2.A
N$5
  Top 0.305: Q5.5,6,7,8-2 Q5.5,6,7,8-3 Q5.5,6,7,8-4 | Q5.5,6,7,8-5 12.65,72.39 Q5.5,6,7,8-2 | Q5.5,6,7,8 Q5.5,6,7,8-2
  Top 1.372: COOLANT.2 13.34,73.74 Q5.5,6,7,8-4 Q5.5,6,7,8-5
N$6
  Top 0.305: Q8.5,6,7,8-2 Q8.5,6,7,8-3 Q8.5,6,7,8-4 | Q8.5,6,7,8-2 50.75,72.39 Q8.5,6,7,8-5 | Q8.5,6,7,8 Q8.5,6,7,8-2
  Top 1.372: CONTACTOR_PRECHARGE.2 51.44,73.74 Q8.5,6,7,8-4 Q8.5,6,7,8-5
N$7  (via drill 0.35)
  Top 0.305: v57.41,38.61 53.09,38.61 v53.09,34.8 | v53.09,32 v48.31,32 | v60.2,40.13 61.13,40.13 62.18,39.07 66.58,39.07 S2.1
  Bottom 0.305: v60.2,40.13 58.93,40.13 v57.4,38.61 v57.41,38.61 | v53.09,34.8 v53.09,32 | v48.31,32 27.94,32 24.77,35.18 U$3.8-TX2/IN1
N$8
  Top 0.152: CCOMHN.2 80.61,2.16 RCOMHN.1 80.1,2.89 ESDCOMH.2
N$9
  Top 0.305: R13.2 18.1,73.88 LED3.A
N$10
  Top 0.152: RCOMLN.2 CCOMLNG.2 73.75,5.84 RCOML.1 73.91,6.33 74.69,7.11 74.69,8.3 74.67,8.32 IC2.41
N$11  (via drill 0.35)
  Top 0.152: R17.1 26.04,7.24 v26.16,7.37
  Bottom 0.152: v26.16,7.37 27.97,7.37 28.32,7.01 38.2,7.01 U2.22
N$12
  Top 0.305: Q7.5,6,7,8-2 38.05,72.39 Q7.5,6,7,8-5 Q7.5,6,7,8-4 | Q7.5,6,7,8 Q7.5,6,7,8-2 | Q7.5,6,7,8-4 Q7.5,6,7,8-3 Q7.5,6,7,8-2
  Top 1.372: CONTACTOR_P.2 38.73,73.74 Q7.5,6,7,8-4 Q7.5,6,7,8-5
N$13
  Top 0.305: R14.2 5.4,73.88 LED4.A
N$14  (via drill 0.4)
  Top 0.305: v60.01,68.58 64.14,72.71 67.81,72.71 X1.1
  Bottom 0.305: U$3.14-A0/TX3/SPDIF_OUT 38.42,68.58 v60.01,68.58
N$17  (via drill 0.4)
  Top 0.305: v60.01,69.85 63.82,73.66 71.12,73.66 73.39,71.39 X1.2
  Bottom 0.305: U$3.15-A1/RX3/SPDIF_IN 37.15,69.85 v60.01,69.85
N$18
  Top 0.305: U$3.18-A4/SDA0 24.91,65.23 32.84,65.23 33.66,66.04 54.29,66.04 63.5,75.25 73.67,75.25 X1.3
N$19
  Top 0.305: U$3.19-A5/SCL0 20.64,62.55 23.81,65.72 30.8,65.72 32.07,66.99 53.98,66.99 63.18,76.2 76.92,76.2 X1.4
N$20  (via drill 0.55, 0.8)
  Top 0.305: U$3.24-A10/TX6/SCL2 43.18,50.48 v43.18,50.8 | v57.78,58.1 64.75,58.1 66.19,59.54 81.76,59.54 84.96,62.75 91.62,62.75 91.62,68.58 90.22,69.97 89.02,69.97 87.66,71.33 X1.5
  Bottom 0.305: v43.18,50.8 46.25,53.87 48.51,53.87 52.74,58.1 v57.78,58.1
N$21  (via drill 0.55, 0.8)
  Top 0.305: U$3.25-A11/RX6/SDA2 45.4,50.16 v45.4,50.8 | v59.69,57.15 64.44,57.15 65.87,58.58 81.44,58.58 85.03,62.17 92.08,62.17 92.08,69.45 X1.6
  Bottom 0.305: v45.4,50.8 47.08,50.8 47.19,50.91 53.45,50.91 v59.69,57.15
N$22  (via drill 0.55)
  Top 0.305: X1.7 68.73,65.83 65.6,68.96 63.39,68.96 61.82,67.39 61.82,66.27 v60.33,64.77
  Bottom 0.305: U$3.40-A16/CS1 44.77,64.77 v60.33,64.77
N$23
  Bottom 0.305: U$3.32-OUT1B 60.33,51.88 68.6,60.15 69.02,60.15 69.64,60.77 69.64,62.08 X1.8
N$24  (via drill 0.55, 0.65, 0.8)
  Top 0.305: v37.78,49.85 37.78,51.44 v45.09,58.74 | v60.64,60.01 63.82,63.18 74.94,63.18 X1.9
  Bottom 0.305: U$3.9-OUT1C 29.84,49.85 v37.78,49.85 | v45.09,58.74 52.73,58.74 53.19,59.2 59.83,59.2 v60.64,60.01
N$25  (via drill 0.55)
  Top 0.305: U$3.6-OUT1D 28.57,56.2 v30.8,56.2 | v33.02,56.2 33.66,56.83 v36.2,56.83 | v45.72,60.96 45.72,60.64 v42.55,57.47 | v58.1,60.33 59.22,60.33 60.32,59.22 60.97,59.22 61.12,59.37 65.37,59.37 66,60 75.96,60 X1.10
  Bottom 0.305: v30.8,56.2 v33.02,56.2 | v36.2,56.83 41.91,56.83 v42.55,57.47 | v45.72,60.96 47.08,60.96 47.19,61.07 57.36,61.07 v58.1,60.33
N$26
  Top 0.305: U$3.33-MCLK2 59.37,63.5 59.37,66.36 60.43,67.42 60.49,67.42 62.61,69.53 67.81,69.53 67.83,69.52 69.55,69.52 71.75,67.31 83.5,67.31 84.64,66.17 84.64,64.65 84.82,64.47 87.17,64.47 88.52,65.83 X1.12
N$27  (via drill 0.55)
  Top 0.305: v30.8,57.47 19.68,57.47 13.58,51.37 12.9,51.37 12.28,50.75 12.28,50.06 U$3.2-OUT2 | v33.02,57.47 34.24,58.69 40.92,58.69 41.32,59.09 41.32,59.42 v42.86,60.96 | v53.98,63.82 58.03,67.87 60.3,67.87 62.6,70.17 67.82,70.17 68.02,69.97 81.85,69.97 X1.11
  Bottom 0.305: v30.8,57.47 v33.02,57.47 | v42.86,60.96 44.03,62.12 44.03,62.99 45.17,64.14 53.66,64.14 v53.98,63.82
N$28  (via drill 0.35)
  Top 0.305: v31.11,7.62 R15.1
  Bottom 0.305: v31.11,7.62 31.11,12.62 U2.27
N$29  (via drill 0.35)
  Top 0.305: v28.57,7.62 R16.1
  Bottom 0.305: v28.57,7.62 28.57,12.62 U2.28
N$31  (via drill 0.35)
  Top 0.305: v23.5,7.62 R18.1
  Bottom 0.305: v23.5,7.62 23.5,12.62 U2.30
N$32
  Top 0.305: R15.2 LED5.A
N$33
  Top 0.305: R16.2 LED6.A
N$34
  Top 0.305: R17.2 LED7.A
N$35
  Top 0.305: R18.2 LED8.A
N$49
  Top 0.152: RCOMLP.2 71.97,7.87 CCOMLPG.2 73.24,8.38 RCOML.2 73.91,10.98 74.14,11.21 74.14,16.58 IC2.40
N$67
  Top 0.152: CCOMLP.2 69.41,5.84 ESDCOML.2 69.98,6.06 RCOMLP.1
N$68
  Top 0.152: CCOMLN.2 69.15,3.37 ESDCOML.1 70.46,3.37 RCOMLN.1
N$72
  Top 0.305: R4.1 R3.2 59.5,16.51 RVC2-1.1
N$73
  Top 0.305: R2.2 47.44,10.8 49.34,10.8 52.07,13.53 R3.1 60.55,13.53 RVC1-1.1
N$75
  Top 0.305: R9.1 R4.2 58.49,19.81 RVC3-1.1
N$111
  Top 0.152: CREFHP-1.2 72.67,15.36 IC2.37
N$112
  Top 0.152: CAVDD-1.2 73.15,16.59 IC2.38
N$113
  Top 0.152: CNEG5V-1.2 76.17,15.1 IC2.44
N$114
  Top 0.152: CDVDD-1.2 82.27,18.6 IC2.49
N$130
  Top 0.305: T2.C 87.47,15.24 88.68,15.95 CNPN1-1.2 RNPN-1.1
N$131
  Top 0.152: IC2.43 75.67,7.22 RCOMH.1 77.64,5.59 RCOMHP.2 CCOMHPG.2
N$132
  Top 0.152: RCOMHN.2 CCOMHNG.2 77.05,3.3 RCOMH.2 75.17,6.02 IC2.42
NFAULT  (via drill 0.35)
  Top 0.305: IC2.62 80.2,25.15 81.02,25.15 81.2,25.33 81.2,26.38 80.52,27.06 v80.52,30.99
  Bottom 0.305: v80.52,30.99 80.31,30.99 78.87,32.43 64.64,32.43 60.73,28.53 58.65,28.53 58.24,28.93 58.24,30.61 51.84,37.02 48.06,37.02 47.88,37.19 47.88,38.18 46.11,39.96 45.44,39.96 45.04,40.36 45.04,40.92 45.57,41.45 48.46,41.45 49.4,42.39 49.4,43.34 48.68,44.05 48.68,47.75 48.06,48.37 47.19,48.37 46.57,47.75 46.57,47.29 45.52,46.25 42.11,46.25 41.49,46.87 41.49,50.28 33.52,58.25 31.6,58.25 U$3.16-A2/RX4/SCL1
NPNB-1
  Top 0.305: T2.B 78.3,16.74 IC2.48
RX_BQ  (via drill 0.35)
  Top 0.305: U$1.18 69.44,28.8 v69.34,28.7 | v82.28,20.09 82.26,20.1 IC2.52
  Bottom 0.305: v82.28,20.09 79.33,20.09 79.24,19.99 78.06,19.99 v69.34,28.7
RX_ESP  (via drill 0.35)
  Top 0.305: U2.24 47.62,21.52 47.62,32.29 51.05,35.72 v51.05,40.64
  Bottom 0.305: U$3.29-TX7 54.63,45.39 55.91,45.39 56.31,44.99 56.31,44.42 55.88,43.99 51.41,43.99 50.62,43.21 50.62,42.64 51.05,42.21 v51.05,40.64
RX_SHFT
  Top 0.305: U$3.34-RX8 57.78,61.12 51.65,54.98 51.65,46.87 59.9,38.62 64.52,38.62 64.7,38.62 67.9,38.62 69.2,37.31 69.8,37.31 70.55,36.56 70.55,36.13 U$1.1
SCK_ESP  (via drill 0.35)
  Top 0.305: v30.8,33.66 24.13,33.66 21.03,36.76 U2.12
  Bottom 0.305: v30.8,33.66 32.5,35.36 34.17,35.36 34.91,36.1 34.91,39.7 36.35,41.13 39.88,41.13 40.65,41.91 48.27,41.91 48.94,42.58 48.94,43.15 47.62,44.46 U$3.27-A13/SCK1
TX_BQ  (via drill 0.35)
  Top 0.305: U$1.20 73.53,30.1 v73.91,29.72 | v81.9,21.03 81.49,20.62 80.18,20.62 IC2.53
  Bottom 0.305: v73.91,29.72 81.9,21.73 v81.9,21.03
TX_ESP  (via drill 0.35)
  Top 0.305: v50.81,45.22 50.81,44.9 51.99,43.72 51.99,34.06 53.77,32.29 53.77,25.12 U2.23
  Bottom 0.305: v50.81,45.22 50.16,45.86 U$3.28-RX7
TX_SHFT
  Top 0.305: U$3.35-TX8 55.24,59.22 49.11,53.08 49.11,46.87 49.73,46.25 51.62,46.25 59.71,38.16 67.65,38.16 69.25,36.56 69.25,36.13 U$1.3
VC0-1
  Top 0.305: IC2.35 IC2.34 71.13,16.57 71.13,15.75 70.95,15.57 66.97,15.57 CVC0-1.2 65.62,14.22 RVC0-1.2
VC1-1
  Top 0.305: RVC1-1.2 63.75,14.9 CVC1-1.2 63.93,16.09 CVC0-1.1 68.07,18.37 68.92,18.37 | IC2.32 68.92,18.37 | 68.92,18.37 IC2.33
VC2-1
  Top 0.305: RVC2-1.2 62.65,16.51 CVC1-1.1 64.34,18.2 CVC2-1.2 66.96,18.2 67.95,19.18 68.6,19.18 IC2.31 IC2.30
VC3-1
  Top 0.305: RVC3-1.2 65.7,19.81 CVC2-1.1 65.79,21.25 CVC3-1.2 66.94,20.6 IC2.28 IC2.29
VC4-1
  Top 0.305: RVC4-1.2 63.75,25.06 CCB10-1.1 66.04,24.8 CVC3-1.1 67.64,21.6 IC2.26 IC2.27
VC_CB_HIGH-1
  Top 0.305: IC2.1 IC2.2 IC2.3 IC2.4 | IC2.4 IC2.5 IC2.6 IC2.7 IC2.8 IC2.9 IC2.10 IC2.11 IC2.12 IC2.13 IC2.14 IC2.15 IC2.16 IC2.17 | IC2.17 IC2.18 IC2.19 IC2.20 IC2.21 IC2.22 IC2.23 IC2.24 IC2.25 | CCB10-1.2 68.03,26.76 IC2.17 | IC2.4 76.67,29.92 RBAT-1.1 77.3,30.66 CBAT-1.2
VCC  (via drill 0.35)
  Top 0.305: LED4.C 5.4,70.96 4.69,71.66 4.69,78.82 7.53,81.66 10.84,81.66 13.34,84.16 | LED3.C 18.1,70.96 17.39,71.66 17.39,74.65 19.06,76.32 22.44,76.32 24,77.89 24,82 CONTACTOR_N.1 | LED2.C 30.8,70.96 30.09,71.66 30.09,74.65 31.76,76.32 35.14,76.32 36.7,77.89 36.7,82 CONTACTOR_P.1 | LED1.C 43.5,70.96 42.79,71.66 42.79,74.65 44.46,76.32 47.84,76.32 49.4,77.89 49.4,82 CONTACTOR_PRECHARGE.1 | R9.2 61.06,24.06 RVC4-1.1 61.21,24.22 v61.21,27.94 | RBAT-1.2 78.32,31.48 v78.59,31.75 | RNPN-1.2 v95.25,17.53
  Top 5.283: 13.34,84.16 13.34,84.15 23.47,84.15 23.59,84.03 CONTACTOR_N.1 28.48,84.03 28.6,84.15 36.17,84.15 36.29,84.03 CONTACTOR_P.1 41.18,84.03 41.3,84.15 48.87,84.15 48.99,84.03 CONTACTOR_PRECHARGE.1 53.88,84.03 54,84.15 61.7,84.15 61.82,84.03 PWR_IN1.1
  Bottom 0.305: v78.59,31.75 78.51,31.67 65.5,31.67 61.77,27.94 v61.21,27.94
  pour Bottom: 0,65.52 92.51,65.52 93.34,66.36 93.34,87.63 92.71,88.27 0,88.27
  pour Bottom: 99.31,15.49 88.9,15.49 85.09,11.68 84.07,11.68 81.03,8.64 81.03,0.51 67.31,0.51 67.31,10.92 64.26,13.97 52.58,13.97 48.77,10.16 48.77,0.25 0.51,0.25 0.25,0.51 0.25,86.87 0.76,87.38 99.31,87.38

## Text on the board
tPlace: GPIO | CAN | BMS Main Board V3 | Joshua Feist, Lance Go, Luc Ah-Hot, Isaac Kim / Jan 2023